# Altium PCB ETZ.PcbDoc
Units mm, origin at the board's own origin, x right, y up, seen from the top; angles counter-clockwise.
Board outline 92.5 x 180 mm, 2 copper layers (Top Layer, Bottom Layer); 37 components, 53 nets, 223 pads, 0 vias.
Unrouted connection lines stored in the file: 121.
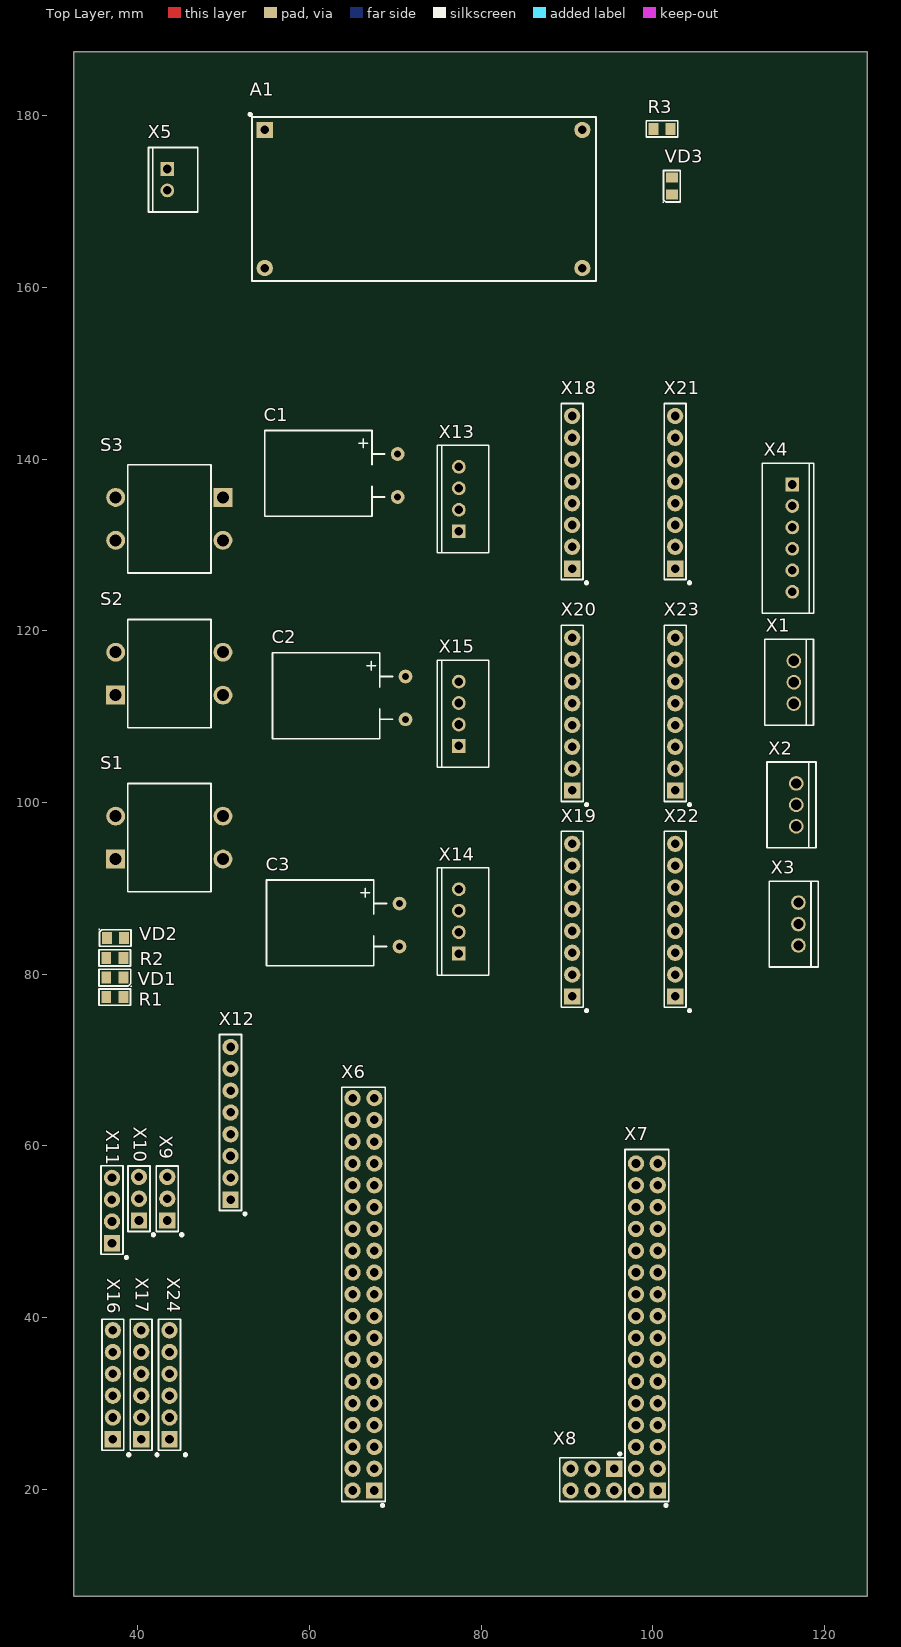
[diagram p0: Top Layer view]
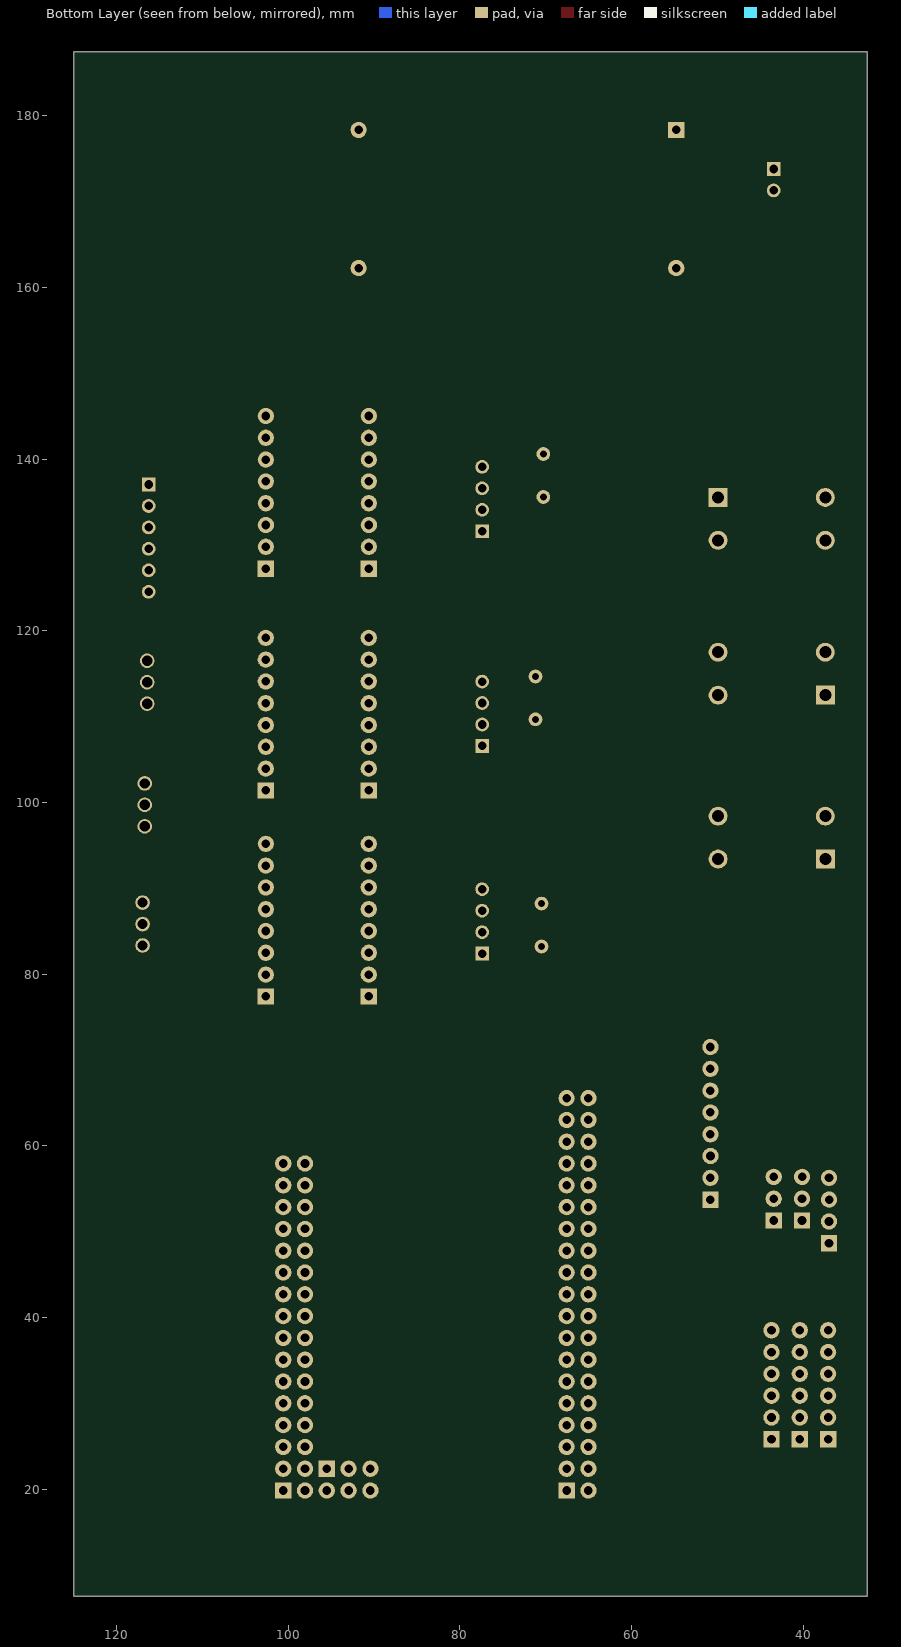
[diagram p1: Bottom Layer view, seen from below]

## Layer stack, top to bottom
Top Solder: solder mask 0.0102, Solder Resist, Dk 3.5
Top Layer: signal copper 0.0356
Dielectric 1: dielectric 0.32, FR-4, Dk 4.8
Bottom Layer: signal copper 0.0356
Bottom Solder: solder mask 0.0102, Solder Resist, Dk 3.5

## Board outline
32.506,7.506 125.006,7.506 125.006,187.506 32.506,187.506

## Design rules (kind name [scope] priority, off if disabled: settings)
Clearance [All] p1: gap=0.254 ignorepadtopadclearanceinfootprint=FALSE
PolygonConnect [All] p1: connectstyle=Relief reliefconductorwidth=0.254 reliefentries=4 polygonreliefangle="90 Angle" airgapwidth=0.254
RoutingVias [All] p1: holewidth=0.711 width=1.27 viastyle="Through Hole" minholewidth=0.711 minwidth=1.27 maxholewidth=0.711 maxwidth=1.27
SolderMaskExpansion [All] p1: expansion=0.102 istentingtop=FALSE
Width [All] p1: maxlimit=0.254 minlimit=0.254 preferedwidth=0.254
30 further rules are at their usual default settings.

## Classes and differential pairs
component class Э3: A1 R1 R2 R3 S1 S2 S3 VD1 VD2 VD3 X1 X2 X3 X4 X5 X6 X7 X8 X9 X10 X11 X12
component class Э3_2: C1 C2 C3 X13 X14 X15 X16 X17 X18 X19 X20 X21 X22 X23 X24

## Components (designator, comment, footprint, x,y, rotation, side; value= is the part's Value field where it differs from the comment)
A1 "LM2596" LM2596 73.787,170.18 r90 top
C1 "150мк" CAPALUM_10x12.5 62.969,138.362 r0 top
C2 "150мк" CAPALUM_10x12.5 63.886,112.446 r0 top
C3 "150мк" CAPALUM_10x12.5 63.18,85.986 r0 top
R1 "1к" Resistor0805 37.311,77.343 r180 top
R2 "1к" Resistor0805 37.311,81.915 r0 top
R3 "1к" Resistor0805 101.075,178.487 r0 top
S1 "BUTTON12" THT12 37.411,93.425 r90 top
S2 "BUTTON12" THT12 37.411,112.522 r90 top
S3 "BUTTON12" THT12 49.911,135.556 r270 top
VD1 "LED0805" LED0805 37.311,79.629 r180 top
VD2 "LED0805" LED0805 37.387,84.201 r0 top
VD3 "LED0805" LED0805 102.235,171.831 r90 top
X1 "DS1069-3M (CWF-3)" CWF-3 115.878,114.025 r180 top
X2 "DS1069-3M (CWF-3)" CWF-3 116.163,99.735 r180 top
X3 "DS1069-3M (CWF-3)" CWF-3 116.417,85.852 r180 top
X4 "DS1069-6M (CWF-6)" CWF-6 116.253,137.063 r0 top
X5 "DS1069-2M (CWF-2)" CWF-2 44.109,172.573 r270 top
X6 "PBD38" PBD38 66.285,22.39 r90 top
X7 "PBD32" PBD32 99.305,22.39 r90 top
X8 "PLS-2.54-2*3" PLS2.54-2*3 92.955,21.12 r180 top
X9 "PLS-2.54-3" PLS-2.54-3 43.434,53.848 r90 top
X10 "PLS-2.54-3" PLS-2.54-3 40.132,53.848 r90 top
X11 "PLS-2.54-4" PLS-2.54-4 36.986,51.198 r90 top
X12 "PBD8" PBD8 50.8,56.28 r90 top
X13 "DS1069-4M (CWF-4)" CWF-4 77.4,131.619 r180 top
X14 "DS1069-4M (CWF-4)" CWF-4 77.4,82.409 r180 top
X15 "DS1069-4M (CWF-4)" CWF-4 77.4,106.6 r180 top
X16 "PLS-2.54-6" pls-2,54-6-tht-v 37.086,32.172 r90 top
X17 "PLS-2.54-6" pls-2,54-6-tht-v 40.386,32.172 r90 top
X18 "PLS-2.54-8" PBD8 90.6,129.8 r90 top
X19 "PLS-2.54-8" PBD8 90.605,79.955 r90 top
X20 "PLS-2.54-8" PBD8 90.605,103.955 r90 top
X21 "PLS-2.54-8" PBD8 102.6,129.8 r90 top
X22 "PLS-2.54-8" PBD8 102.6,79.955 r90 top
X23 "PLS-2.54-8" PBD8 102.605,103.955 r90 top
X24 "PLS-2.54-6" pls-2,54-6-tht-v 43.688,32.172 r90 top

## Footprints (in the part's own frame and the unit in brackets; to place one, negate y for a bottom-side part, rotate by r counter-clockwise, add the part's x,y. Pads: shape width x height; smd on the part's side, far side on the other; paste and mask are expansions set on the pad)
CAPALUM_10x12.5 [mm] "Ýëåêòðîëèòè÷åñêèé àëþìèíèåâûé êîíäåíñàòîð ñ ðàäèàëüíûìè âûâîäàìè 10*12.5ìì"
  round 1.6 hole 0.8: 1(7.3,2.25) 2(7.3,-2.75)
  silkscreen extent -8.2,-5 5.8,5, body extent -8.2,-4.99 7.6,4.99, height 9
CWF-2 [mm]
  rect 1.6x1.6 hole 1: 1(-1.25,-0.675)
  round 1.6 hole 1: 2(1.25,-0.675)
  silkscreen extent -3.75,-2.88 3.75,2.88, body extent -3.75,-2.87 3.75,2.88, height 7
CWF-3 [mm]
  round 1.7 hole 1.2: 1(-0.55,-2.5) 2(-0.55,0) 3(-0.55,2.5)
  silkscreen extent -2.85,-5 2.85,5, body extent -2.9,-5 2.8,5, height 7.7
CWF-4 [mm]
  rect 1.6x1.6 hole 1: 1(0,0)
  round 1.6 hole 1: 2(0,-2.5) 3(0,-5) 4(0,-7.5)
  silkscreen extent -3.5,-10 2.5,2.5, body extent -3.55,-9.95 2.2,2.45, height 7
CWF-6 [mm]
  rect 1.6x1.6 hole 1: 1(0,0)
  round 1.6 hole 1: 2(0,-2.5) 3(0,-5) 4(0,-7.5) 5(0,-10) 6(0,-12.5)
  silkscreen extent -3.5,-15 2.5,2.5, body extent -3.52,-15 2.22,2.5, height 7
LED0805 [mm]
  rect 1.15x1.4 smd: 1(-1,0) 2(1,0)
  silkscreen extent -1.9,-0.95 1.83,1.03, body extent -1.01,-0.65 1.01,0.6, height 1.1
LM2596 [mm]
  rect 1.9x1.9 hole 1: 1(8.191,19)
  round 1.9 hole 1: 2(-7.9,19) 3(8.191,-18) 4(-7.9,-18)
  silkscreen extent -9.4,-19.6 10,20.7, body extent -9.39,-19.5 9.7,20.5, height 17.53
PBD8 [mm]
  rect 1.9x1.9 hole 1: 1(-2.54,0)
  round 1.9 hole 1: 2(0,0) 3(2.545,0.005) 4(5.08,0) 5(7.62,0) 6(10.16,0) 7(12.7,0) 8(15.24,0)
  silkscreen extent -4.2,-1.68 16.7,1.28, body extent -3.8,-1.23 16.52,1.29, height 8.5
PBD32 [mm]
  rect 1.9x1.9 hole 1: 1(-2.54,-1.27)
  round 1.9 hole 1: 2(-2.54,1.27) 3(0,-1.27) 7(5.08,-1.27) 8(5.08,1.27) 13(12.7,-1.27) 14(12.7,1.27) 19(20.32,-1.27) 20(20.32,1.27) 25(27.94,-1.27) 26(27.94,1.27) 31(35.56,-1.27) 32(35.56,1.27)
  round 1.9 hole 1 mask+0.102: 4(0,1.27) 5(2.54,-1.27) 6(2.54,1.27) 9(7.62,-1.27) 10(7.62,1.27) 11(10.16,-1.27) 12(10.16,1.27) 15(15.24,-1.27) 16(15.24,1.27) 17(17.78,-1.27) 18(17.78,1.27) 21(22.86,-1.27) 22(22.86,1.27) 23(25.4,-1.27) 24(25.4,1.27) 27(30.48,-1.27) 28(30.48,1.27) 29(33.02,-1.27) 30(33.02,1.27)
  silkscreen extent -4.28,-2.55 37.2,2.54, body extent -3.6,-2.68 37.04,2.4, height 8.5
PBD38 [mm]
  rect 1.9x1.9 hole 1: 1(-2.54,-1.27)
  round 1.9 hole 1: 2(-2.54,1.27) 3(0,-1.27) 7(5.08,-1.27) 8(5.08,1.27) 13(12.7,-1.27) 14(12.7,1.27) 19(20.32,-1.27) 20(20.32,1.27) 25(27.94,-1.27) 26(27.94,1.27) 31(35.56,-1.27) 32(35.56,1.27) 37(43.18,-1.27) 38(43.18,1.27)
  round 1.9 hole 1 mask+0.102: 4(0,1.27) 5(2.54,-1.27) 6(2.54,1.27) 9(7.62,-1.27) 10(7.62,1.27) 11(10.16,-1.27) 12(10.16,1.27) 15(15.24,-1.27) 16(15.24,1.27) 17(17.78,-1.27) 18(17.78,1.27) 21(22.86,-1.27) 22(22.86,1.27) 23(25.4,-1.27) 24(25.4,1.27) 27(30.48,-1.27) 28(30.48,1.27) 29(33.02,-1.27) 30(33.02,1.27) 33(38.1,-1.27) 34(38.1,1.27) 35(40.64,-1.27) 36(40.64,1.27)
  silkscreen extent -4.28,-2.55 44.45,2.54, body extent -3.88,-2.69 44.37,2.39, height 8.5
PLS2.54-2*3 [mm]
  rect 1.9x1.9 hole 1: 1(-2.54,-1.27)
  round 1.9 hole 1: 2(-2.54,1.27) 3(0,-1.27)
  round 1.9 hole 1 mask+0.102: 4(0,1.27) 5(2.54,-1.27) 6(2.54,1.27)
  silkscreen extent -3.82,-3 3.81,2.54, body extent -3.71,-2.54 3.91,2.54, height 8.59
pls-2,54-6-tht-v [mm] "PLS-6"
  rect 1.9x1.9 hole 1: 1(-6.35,0)
  round 1.9 hole 1: 2(-3.81,0) 3(-1.27,0) 4(1.27,0) 5(3.81,0) 6(6.35,0)
  silkscreen extent -8.16,-1.85 7.62,1.27, body extent -7.62,-1.27 7.62,1.27, height 8.54
PLS-2.54-3 [mm]
  rect 1.9x1.9 hole 1: 1(-2.54,0)
  round 1.9 hole 1: 2(0,0) 3(2.545,0.005)
  silkscreen extent -4.2,-1.68 3.82,1.28, body extent -3.81,-1.27 3.81,1.27, height 8.59
PLS-2.54-4 [mm]
  rect 1.9x1.9 hole 1: 1(-2.54,0)
  round 1.9 hole 1: 2(0,0) 3(2.545,0.005) 4(5.08,0)
  silkscreen extent -4.2,-1.68 6.5,1.28, body extent -3.79,-1.37 6.37,1.17, height 8.6
Resistor0805 [mm]
  rect 1.15x1.4 smd: 1(-1,0) 2(1,0)
  silkscreen extent -1.83,-0.95 1.83,0.95, body extent -1.1,-0.7 1.1,0.7, height 0.45
THT12 [mm]
  rect 2.2x2.2 hole 1.4: 1(0,0)
  round 2.2 hole 1.4: 1(0,-12.5) 2(5,0) 2(5,-12.5)
  silkscreen extent -3.8,-11.1 8.8,-1.4

## Part data
C1 C2 C3: library part B41858C6157M, "Конденсатор эл.лит. алюм. 150мкФ 50В", Manufacturer=EPCOS, Voltage=50В, ESR=0,3Ом, Name=B41858C6157M
R1 R2 R3: library part RESISTOR, nam=резистор
X1 X2 X3: library part CWF-3, "Разъем - 3 конт. прямая вилка на плату", Contact_3=GND, Name="DS1069-3M (CWF-3)"
  X1 X2: Contact_1=S, Contact_2=VCC
  X3: Contact_1=VCC, Contact_2=S
X4: library part CWF-6, "Разъем - 6 конт. прямая вилка на плату", Contact_1=VCC, Contact_2=SDA, Contact_3=SCL, Contact_4=DIR, Contact_5=GND, Name="DS1069-6M (CWF-6)"
X5: library part CWF-2, "Разъем - 2 конт. прямая вилка на плату", Contact_1=VIN, Contact_2=GND, Name="DS1069-2M (CWF-2)"
X6: library part PLS-2.54-2*21, Contact1=D32, Contact2=D33, Contact3=D34, Contact4=D35, Contact5=D36, Contact6=D37, Contact7=D38, Contact8=D39, Contact9=D40, Contact10=D41, Contact11=D42, Contact12=D43, Contact13=D44, Contact14=D45, Contact15=D46, Contact16=D47, Contact17=D48, Contact18=D49, Contact19=D50, Contact20=D51, Contact21=D52, Contact22=D53, Contact23=A0, Contact24=A1, Contact25=A2, Contact26=A3, Contact27=A4, Contact28=A5, Contact29=A6, Contact30=A7, Contact31=A8, Contact32=A9, Contact33=A10, Contact34=A11, Contact35=A12, Contact36=A13, Contact37=A14, Contact38=A15, nam=PBD38
X7: library part PLS-2.54-2*16, Contact1=RX, Contact2=TX, Contact3=D2, Contact4=D3, Contact5=D4, Contact6=D5, Contact7=D6, Contact8=D7, Contact9=D8, Contact10=D9, Contact11=D10, Contact12=D11, Contact13=D12, Contact14=D13, Contact15=D14, Contact16=D15, Contact17=D16, Contact18=D17, Contact19=D18, Contact20=D19, Contact21=D20, Contact22=D21, Contact23=D22, Contact24=D23, Contact25=D24, Contact26=D25, Contact27=D26, Contact28=D27, Contact29=D28, Contact30=D29, Contact31=D30, Contact32=D31, nam=PBD32
X9 X10: library part "PLS-2.54-3 1>2", Contact_1=S, Contact_2=VCC, Contact_3=GND, nam=PLS-2.54-3
X12: library part PLS-2.54-8, Contact_1=VCC, Contact_2=GND, Contact_3=NC, Contact_4=DIN, Contact_5=CLK, Contact_6=CS, Contact_7=D/S, Contact_8=RES, nam=PBD8
X13 X14 X15: library part CWF-4, "Разъем - 4 конт. прямая вилка на плату", Contact_1=1B, Contact_2=1A, Contact_3=2A, Contact_4=2B, Name="DS1069-4M (CWF-4)"
A1: Contact_1=+12,6, Contact_2=GND, Contact_3=OUT
X8: Contact1=VIN, Contact2=VIN, Contact3=GND, Contact4=GND, Contact5=VCC, Contact6=VCC, nam=PLS-2.54-2*3
X11: Contact_1=TX, Contact_2=RX, Contact_3=VCC, Contact_4=GND, nam=PLS-2.54-4
X16: Contact_1=GND, Contact_2=GND, Contact_3=GND, Contact_4=GND, Contact_5=GND, Contact_6=GND, nam=PLS-2.54-6
X17: Contact_1=VCC, Contact_2=VCC, Contact_3=VCC, Contact_4=VCC, Contact_5=VCC, Contact_6=VCC, nam=PLS-2.54-6
X18 X19 X20: Contact_1=GND, Contact_2=VDD, Contact_3=1B, Contact_4=1A, Contact_5=2A, Contact_6=2B, Contact_7=GND, Contact_8=VMOT, nam=PLS-2.54-8
X21 X22 X23: Contact_1=DIR, Contact_2=STEP, Contact_3=SLEEP, Contact_4=RESET, Contact_5=MS3, Contact_6=MS2, Contact_7=MS1, Contact_8=ENABLE, nam=PLS-2.54-8
X24: Contact_1=D1, Contact_2=D2, Contact_3=D3, Contact_4=A1, Contact_5=A2, Contact_6=A3, nam=PLS-2.54-6

## Nets (pads, with @x,y where several pads share a name; then routed paths per layer and width w, separated by ;. In a path a pad name is that pad's centre, name@x,y a point inside that pad or via, vN(x,y) a via of type N, cw(c..) or ccw(c..) an arc to the next point about the centre after c; other vN are vias at no path point)
+5В: A1.3 R3.1 X1.2 X2.2 X3.1 X4.1 X8.5 X9.2 X10.2 X11.3 X12.1 X17.1 X17.2 X17.3 X17.4 X17.5 X17.6 X21.5 X21.6 X21.7 X22.5 X22.6 X22.7 X23.5 X23.6 X23.7
A1: X6.26 X24.4
A2: X6.27 X24.5
A3: X6.28 X24.6
ANALOG: X6.23 X9.1
BUTTON1: S1.2 X7.28
BUTTON2: S2.2 X7.29
BUTTON3: S3.2 X7.30
CLK: X6.21 X12.5
CS: X7.24 X12.6
D1: X6.11 X24.1
D2: X6.12 X24.2
D3: X6.13 X24.3
DIGITAL: X7.27 X10.1
DIR: X4.4 X7.31
DIR1: X6.5 X21.1
DIR2: X6.7 X22.1
DIR3: X6.9 X23.1
DS: X7.25 X12.7
GND: A1.2 A1.4 C1.2 C2.2 C3.2 S1.1 S2.1 S3.1 VD2.1 VD3.1 X1.3 X2.3 X3.3 X4.5 X5.2 X8.3 X8.4 X9.3 X10.3 X11.4 X12.2 X16.1 X16.2 X16.3 X16.4 X16.5 X16.6 X18.1 X18.7 X19.1 X19.7 X20.1 X20.7
LED1: R1.1 X6.2
LED2: R2.1 X6.3
MOSI: X6.20 X12.4
NetR1_2: R1.2 VD1.2
NetR2_2: R2.2 VD1.1 VD2.2
NetR3_2: R3.2 VD3.2
NetX13_1: X13.1 X18.3
NetX13_2: X13.2 X18.4
NetX13_3: X13.3 X18.5
NetX13_4: X13.4 X18.6
NetX14_1: X14.1 X19.3
NetX14_2: X14.2 X19.4
NetX14_3: X14.3 X19.5
NetX14_4: X14.4 X19.6
NetX15_1: X15.1 X20.3
NetX15_2: X15.2 X20.4
NetX15_3: X15.3 X20.5
NetX15_4: X15.4 X20.6
NetX21_3: X21.3 X21.4
NetX22_3: X22.3 X22.4
NetX23_3: X23.3 X23.4
RES: X7.26 X12.8
RXD3: X7.16 X11.2
SCL: X4.3 X7.22
SDA: X4.2 X7.21
SERVO: X3.2 X7.23
STEP1: X6.4 X21.2
STEP2: X6.6 X22.2
STEP3: X6.8 X23.2
TCRT1: X1.1 X6.24
TCRT2: X2.1 X6.25
TXD3: X7.15 X11.1
VCC: A1.1 C1.1 C2.1 C3.1 X5.1 X18.8 X19.8 X20.8
pads on no net: X4.6 X6.1 X6.10 X6.14 X6.15 X6.16 X6.17 X6.18 X6.19 X6.22 X6.29 X6.30 X6.31 X6.32 X6.33 X6.34 X6.35 X6.36 X6.37 X6.38 X7.1 X7.2 X7.3 X7.4 X7.5 X7.6 X7.7 X7.8 X7.9 X7.10 X7.11 X7.12 X7.13 X7.14 X7.17 X7.18 X7.19 X7.20 X7.32 X8.1 X8.2 X8.6 X12.3 X18.2 X19.2 X20.2 X21.8 X22.8 X23.8

## Silkscreen, mask and mechanical layers (free items; w line width, h text height)
Mechanical 1:
  circle w0.013: c120.852,11.506 r1.867
  circle w0.013: c36.661,11.506 r1.867
  circle w0.013: c36.661,183.506 r1.867
  circle w0.013: c120.852,183.506 r1.867
  lines w0.013: 32.506,7.506 32.506,187.506 125.006,187.506 125.006,7.506 32.506,7.506